# EAGLE board Control board POD (CMS) (EAGLE 6.1)
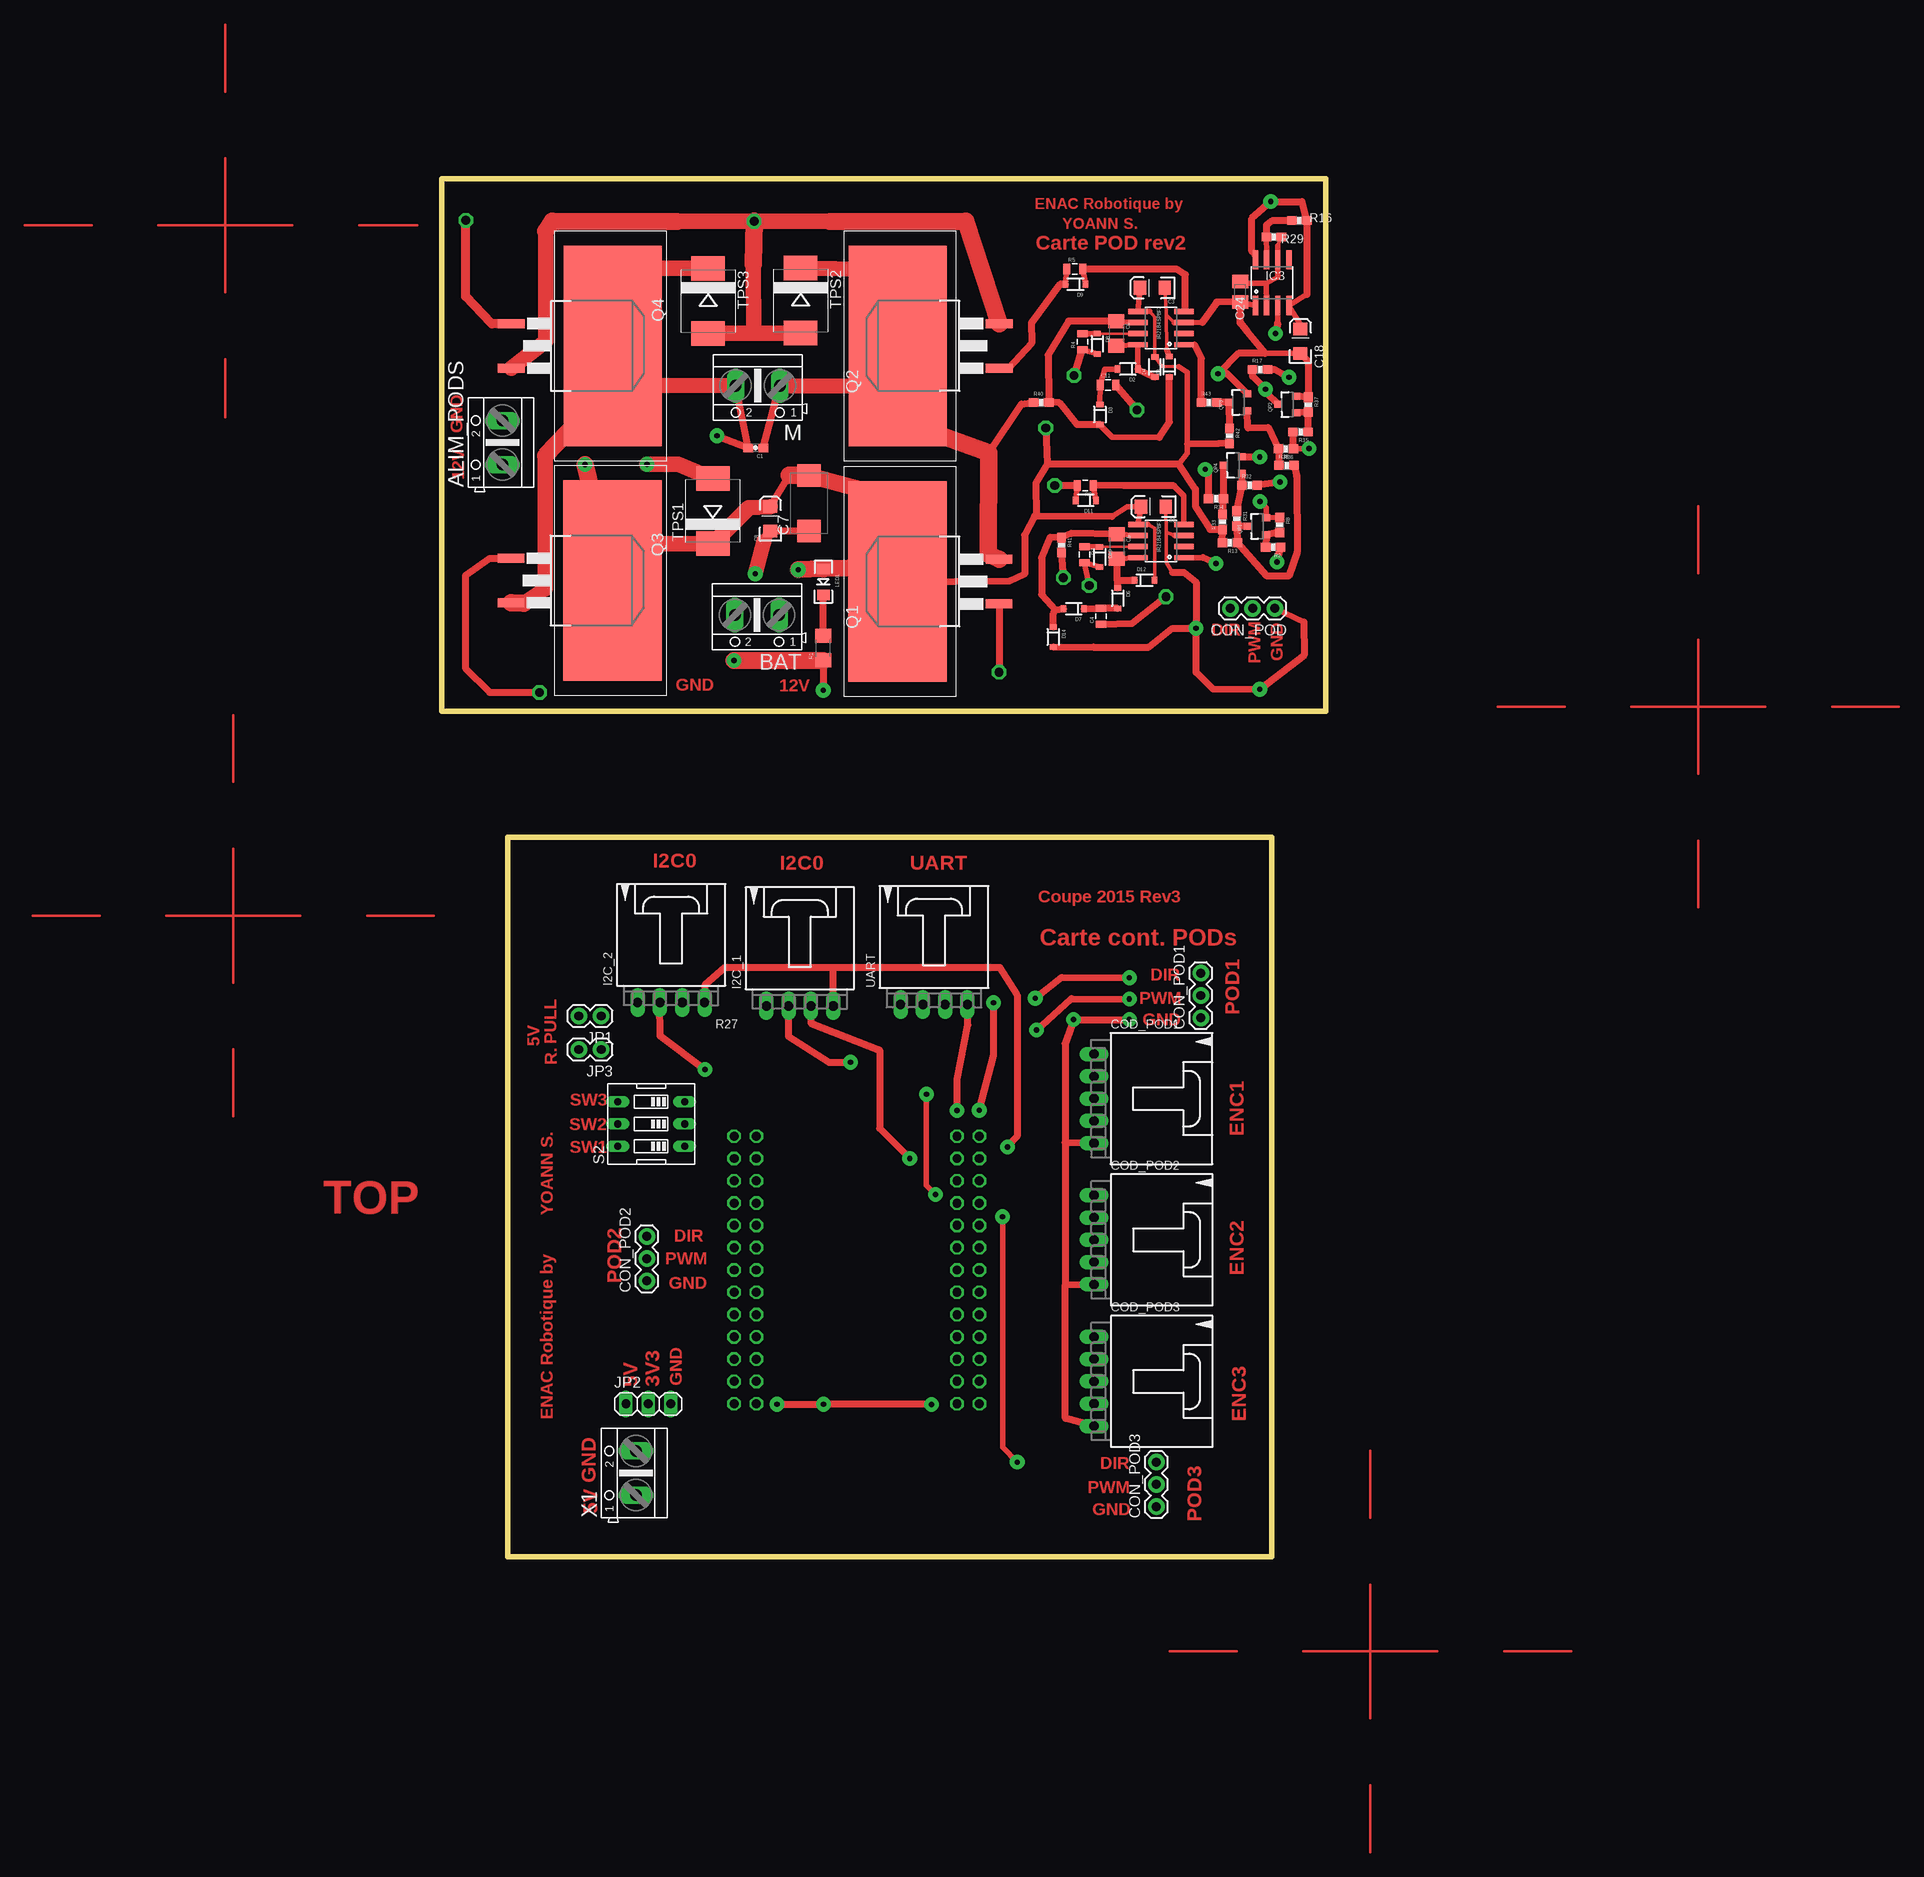
[diagram p0: board, top side]
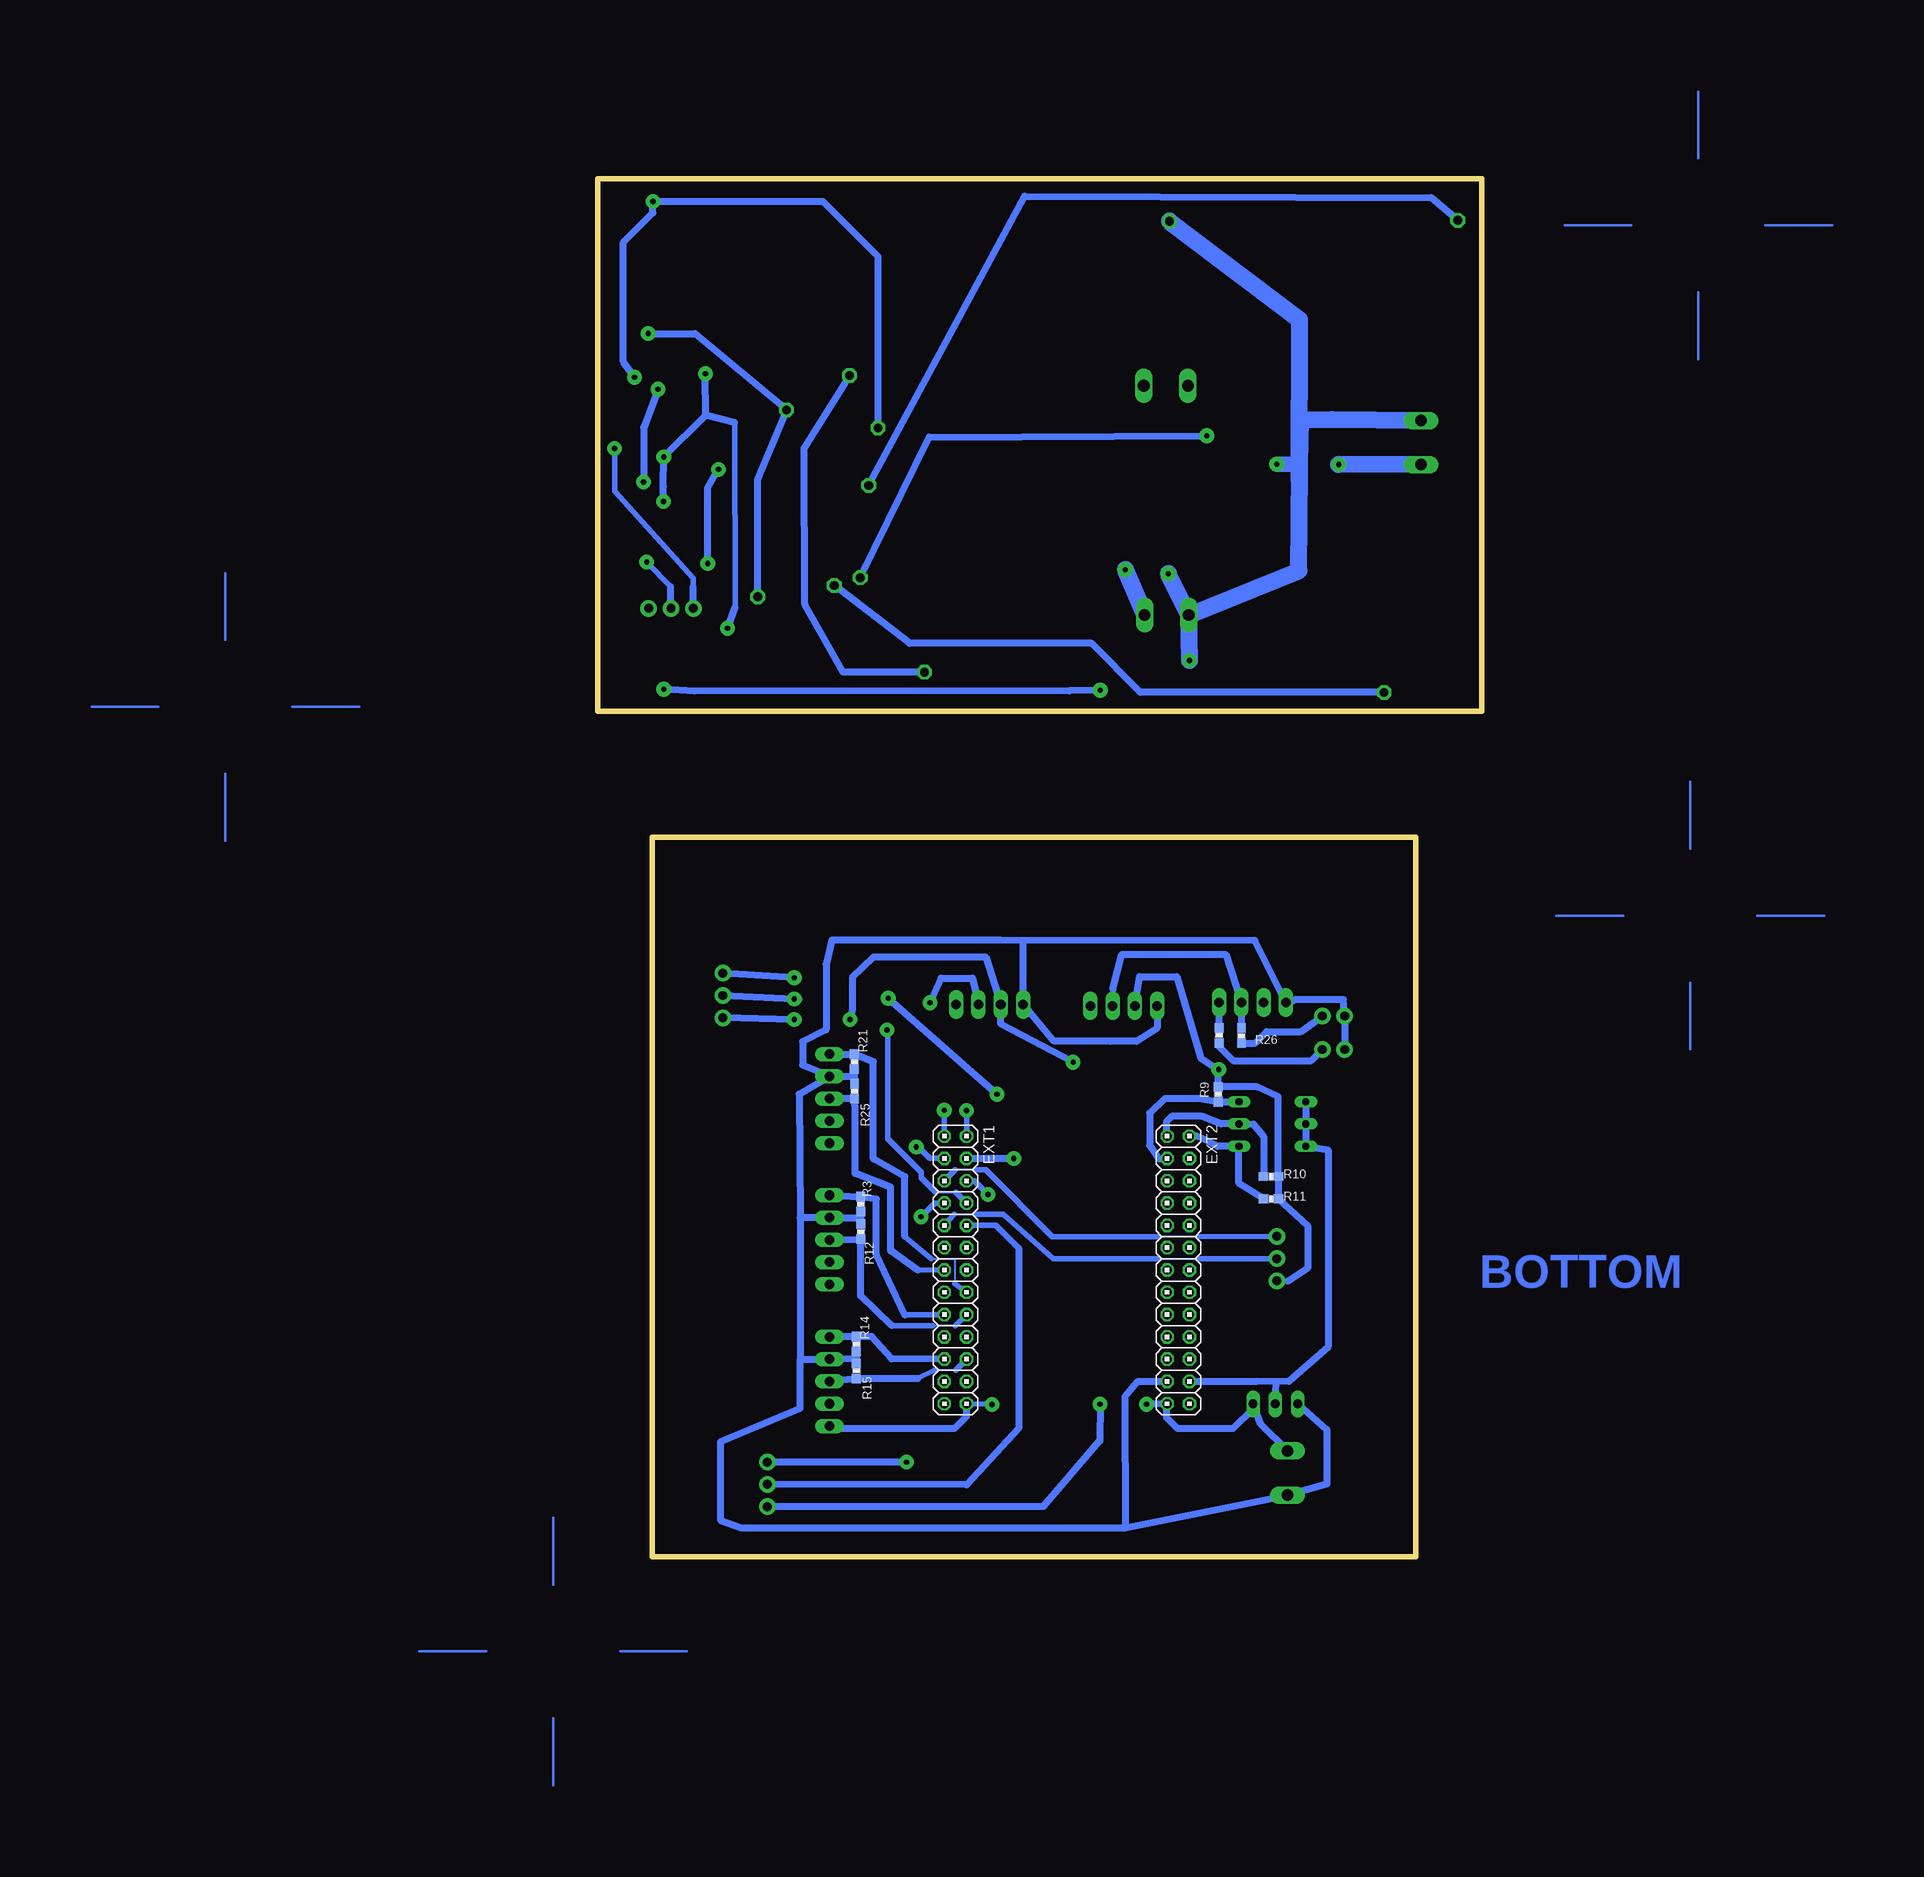
[diagram p1: board, bottom side, seen from below]

Size 100.72 x 157 mm. Coordinates in mm from the lower left corner, seen from the top.
Outline: 7.54,0 94.54,0 94.54,82 7.54,82 7.54,0
Outline: 100.72,157 0,157 0,96.36 100.72,96.36 100.72,157
Copper layers (1*16): Top 0.035mm / dielectric 1.5mm / Bottom 0.035mm
Design rules: minimum track width 10mil, minimum drill 24mil, track to track 10mil, track to pad 10mil, pad to pad 10mil, via to via 10mil, smd to smd 8mil, copper to edge 30mil, drill to drill 8mil, minimum pad ring 10mil, minimum via ring 8mil, stop-mask expansion 4mil, vias tented up to drill 0mil, thermal gap 10mil
Net classes: 0 default: width 1 mm; 1 LPC: width 0.5 mm; 2 POWER: width 4 mm

## Footprints (pad centres in the part's own frame; a part is rotated, then mirrored left to right if it is on the bottom)
AK500/2 = drill 1.321 long: 1 -2.515,0; 2 2.515,0
0603-CAP = smd 1.1 x 1: 1 -0.85,0; 2 0.85,0
EIA3216 = smd 1.4 x 1.6: A 1.4,0; C -1.4,0
0805 = smd 0.8 x 1.2: 1 -0.9,0; 2 0.9,0
1206 = smd 1.6 x 1.8: 1 -1.4,0; 2 1.4,0
D/7343-31R = smd 2.55 x 2.7: + 3.175,0; - -3.175,0
R/2012-12R = smd 1.55 x 1.8: + 1.175,0; - -1.175,0
70553-05 = drill 1.092 long: 1 -5.08,-7.62; 2 -2.54,-7.62; 3 0,-7.62; 4 2.54,-7.62; 5 5.08,-7.62
1X03 = drill 1.016 pad 1.88: 1 0,0; 2 2.54,0; 3 5.08,0
SOD-323 = smd 0.63 x 0.83: A 1.15,0; C -1.15,0
2X13 = drill 1.016 octagon: 1 -15.24,-1.27; 2 -15.24,1.27; 3 -12.7,-1.27; 4 -12.7,1.27; 5 -10.16,-1.27; 6 -10.16,1.27; 7 -7.62,-1.27; 8 -7.62,1.27; 9 -5.08,-1.27; 10 -5.08,1.27; 11 -2.54,-1.27; 12 -2.54,1.27; 13 0,-1.27; 14 0,1.27; 15 2.54,-1.27; 16 2.54,1.27; 17 5.08,-1.27; 18 5.08,1.27; 19 7.62,-1.27; 20 7.62,1.27; 21 10.16,-1.27; 22 10.16,1.27; 23 12.7,-1.27; 24 12.7,1.27; 25 15.24,-1.27; 26 15.24,1.27
70553-04 = drill 1.092 long: 1 -3.81,-7.62; 2 -1.27,-7.62; 3 1.27,-7.62; 4 3.81,-7.62
SO08 = smd 0.61 x 2.21: 1 -1.905,-2.616; 2 -0.635,-2.616; 3 0.635,-2.616; 4 1.905,-2.616; 5 1.905,2.616; 6 0.635,2.616; 7 -0.635,2.616; 8 -1.905,2.616
1X02 = drill 1.016 pad 1.88: 1 0,0; 2 2.54,0
1X03' = drill 1.016 long: 1 -2.54,0; 2 0,0; 3 2.54,0
LED-1206 = smd 1.2 x 1.4: A -1.5,0; C 1.5,0
D2PAK-3 = smd 1.016 x 3.05: 1 -2.54,-11.31; 3 2.54,-11.31 | smd 22.86 x 11.176: 4 0,0.254
SOT23-3 = smd 0.8 x 0.9: 1 -0.95,-1; 2 0.95,-1; 3 0,1.1
0603-RES = smd 1.1 x 1: 1 -0.85,0; 2 0.85,0
EDG-03 = drill 0.813 long: 1 -2.54,-3.81; 2 0,-3.81; 3 2.54,-3.81; 4 2.54,3.81; 5 0,3.81; 6 -2.54,3.81
SMC = smd 2.8 x 3.8: A 3.7,0; C -3.7,0

## Placement (x,y rotation side)
ALIM_PODS  12  [AK500/2]  6.94,126.94 90 top
BAT  12  [AK500/2]  35.91,107.29 180 top
C1  1uF  [0603-CAP]  35.78,126.34 180 top
C2  10uF  [EIA3216]  81.08,119.65 180 top
C3  10uF  [EIA3216]  80.97,144.56 180 top
C4  680nF  [0805]  75.12,107.15 90 top
C5  680nF  [1206]  76.92,115.11 270 top
C6  680nF  [1206]  76.84,139.37 270 top
C7  220uF  [D/7343-31R]  41.84,120.03 90 top
C8  220nF  [EIA3216]  37.45,118.25 90 top
C11  680nF  [0805]  75.91,133.52 0 top
C18  10uF  [EIA3216]  97.83,138.5 90 top
C24  100nF  [R/2012-12R]  90.96,144.14 90 top
COD_POD1  C-GRID-05-70553  [70553-05]  81.93,52.2 270 top
COD_POD2  C-GRID-05-70553  [70553-05]  81.94,36.11 270 top
COD_POD3  C-GRID-05-70553  [70553-05]  81.94,19.98 270 top
CON_POD  [1X03]  94.92,108.06 180 top
CON_POD1  [1X03]  86.48,61.41 90 top
CON_POD2  [1X03]  23.36,31.43 90 top
CON_POD3  [1X03]  81.42,5.71 90 top
D1  [SOD-323]  82.9,135.58 90 top
D2  [SOD-323]  78.16,135.32 180 top
D3  [SOD-323]  74.99,130.13 270 top
D4  [SOD-323]  81.25,135.56 90 top
D6  [SOD-323]  77.01,109.21 270 top
D7  [SOD-323]  72.01,108 180 top
D8  [SOD-323]  74.68,138.21 270 top
D9  [SOD-323]  72.22,144.97 180 top
D10  [SOD-323]  74.95,113.92 270 top
D11  [SOD-323]  73.38,120.36 180 top
D12  [SOD-323]  80.07,111.26 0 top
D14  [SOD-323]  69.67,104.8 270 top
EXT1  [2X13]  59.98,32.68 270 bottom
EXT2  [2X13]  34.58,32.68 270 bottom
I2C_1  C-GRID-04-70553  [70553-04]  40.8,70.39 0 top
I2C_2  C-GRID-04-70553  [70553-04]  26.13,70.78 0 top
IC3  NE555D  [SO08]  94.61,145.15 0 top
IR2184SPBF1  IR2184SPBF  [SO08]  81.94,115.72 90 top
IR2184SPBF2  IR2184SPBF  [SO08]  81.93,139.99 90 top
JP1  [1X02]  18.17,61.61 180 top
JP2  [1X03']  23.53,17.42 0 top
JP3  [1X02]  18.17,57.8 180 top
LED1  [LED-1206]  43.48,111.06 270 top
M  [AK500/2]  36,133.42 180 top
Q1  MOSFET-NCHANNELD2PAK  [D2PAK-3]  52.18,111.11 90 top
Q2  MOSFET-NCHANNELD2PAK  [D2PAK-3]  52.19,137.96 90 top
Q3  MOSFET-NCHANNELD2PAK  [D2PAK-3]  19.2,111.23 270 top
Q4  MOSFET-NCHANNELD2PAK  [D2PAK-3]  19.24,137.96 270 top
QP1  [SOT23-3]  92.92,117.41 90 top
QP2  [SOT23-3]  96.38,131.28 90 top
QP3  [SOT23-3]  90.79,131.54 90 top
QP4  [SOT23-3]  90.18,124.37 90 top
R1  560  [1206]  43.45,103.53 90 top
R2  10k  [0603-RES]  94.72,115.03 180 top
R3  3k3  [0603-RES]  70.77,40.17 270 bottom
R4  15  [0805]  72.99,138.44 90 top
R5  15  [0805]  72.12,146.71 0 top
R6  15  [0805]  73.32,122.06 180 top
R7  15  [0805]  73.21,114.18 270 top
R8  10k  [0603-RES]  95.46,117.57 270 top
R9  10k  [0603-RES]  30.04,52.69 90 bottom
R10  10k  [0603-RES]  24.02,43.32 0 bottom
R11  10k  [0603-RES]  24.02,40.78 0 bottom
R12  3k3  [0603-RES]  70.77,37.05 270 bottom
R13  1k  [0603-RES]  89.8,115.53 180 top
R14  3k3  [0603-RES]  71.27,24.22 270 bottom
R15  3k3  [0603-RES]  71.27,21.17 270 bottom
R16  1k  [0603-RES]  97.71,152.25 0 top
R17  1k  [0603-RES]  93.23,135.27 0 top
R21  3k3  [0603-RES]  71.49,56.41 270 bottom
R25  3k3  [0603-RES]  71.49,53.05 270 bottom
R26  3.3k  [0603-RES]  27.37,59.38 90 bottom
R27  3.3k  [0603-RES]  29.92,59.4 90 bottom
R29  10k  [0603-RES]  94.8,150.37 180 top
R31  10k  [0603-RES]  90.58,118.28 270 top
R32  10k  [0603-RES]  92.03,122.09 0 top
R33  1k  [0603-RES]  88.96,117.9 90 top
R34  10k  [0603-RES]  88.22,120.54 180 top
R35  10k  [0603-RES]  97.85,128.16 180 top
R36  10k  [0603-RES]  96.17,126.23 180 top
R37  10k  [0603-RES]  98.71,131.26 270 top
R38  10k  [0603-RES]  96.25,124.35 0 top
R40  15  [0603-RES]  68.3,131.51 0 top
R41  15  [0603-RES]  70.6,115.26 270 top
R42  1k  [0603-RES]  89.75,127.7 270 top
R43  10k  [0603-RES]  87.41,131.51 0 top
S2  [EDG-03]  23.86,49.31 90 top
TPS1  [SMC]  30.89,119.13 90 top
TPS2  [SMC]  40.89,143.12 270 top
TPS3  [SMC]  30.35,143.09 270 top
UART  C-GRID-04-70553  [70553-04]  56.08,70.55 0 top
X1  [AK500/2]  22.13,9.54 90 top

## Library data of the parts
ALIM_PODS BAT M X1 = con-ptr500; OC_FARNELL: unknown; OC_NEWARK: unknown
C1 IC3 JP1 JP3 Q1-Q4 QP1-QP4 R1 = SparkFun
C2 C3 C18 = SparkFun-Capacitors; PROD_ID: CAP-00811
C4-C6 C11 = SparkFun-Capacitors
C7 C24 = rcl
C8 = SparkFun-Capacitors; PROD_ID: CAP-00811; VALUE: 10uF
COD_POD1-COD_POD3 I2C_1 I2C_2 UART = con-molex; OC_FARNELL: unknown; OC_NEWARK: unknown
CON_POD CON_POD1-CON_POD3 = SparkFun-Connectors
D1-D4 D6-D12 D14 = SparkFun-DiscreteSemi; PROD_ID: DIO-09646
EXT1 EXT2 JP2 = pinhead
IR2184SPBF1 IR2184SPBF2 = IR2184SPBF
LED1 = SparkFun-LED; PROD_ID: DIO-09955; VALUE: WHITE
R2-R17 R21 R25-R27 R29 R31-R38 R40-R43 = SparkFun-Passives
S2 = special
TPS1-TPS3 = diode

## Nets
3V3 [POWER]: EXT2.24 JP2.2 S2.4 S2.5 S2.6
5V_CMD: COD_POD1.2 COD_POD2.2 COD_POD3.2 EXT2.23 I2C_1.1 I2C_2.1 JP1.2 JP2.1 JP3.2 R3.2 R12.1 R14.2 R15.1 R21.2 R25.1 UART.1 X1.1
12V_BAT: ALIM_PODS.1 BAT.1 C2.A C3.A C7.+ C8.A C18.A D4.A D12.A IC3.4 IC3.8 IR2184SPBF1.5 IR2184SPBF2.5 LED1.A Q1.4 Q3.4 R13.2 R16.2 R17.2 R33.1 R42.2 TPS1.C
BSTRP: C4.1 C11.2 IC3.3
CHA_POD1_LPC: COD_POD1.3 EXT1.13 R25.2
CHA_POD2_LPC: COD_POD2.3 EXT1.18 R12.2
CHA_POD3_LPC: COD_POD3.3 EXT1.22 R15.2
CHB_POD1_LPC: COD_POD1.1 EXT1.16 R21.1
CHB_POD2_LPC: COD_POD2.1 EXT1.17 R3.1
CHB_POD3_LPC: COD_POD3.1 EXT1.21 R14.1
DIR: CON_POD.3 R35.2 R36.1
DIR_POD1_LPC: CON_POD1.3 EXT1.6
DIR_POD2_LPC: CON_POD2.3 EXT1.5
DIR_POD3_LPC: CON_POD3.3 EXT1.7
GATE_Q3: D9.A Q2.1 R5.1
GATE_Q4: D10.A Q3.1 R7.2
GND_CMD [POWER]: COD_POD1.5 COD_POD2.5 COD_POD3.5 CON_POD1.1 CON_POD2.1 CON_POD3.1 EXT1.26 EXT2.25 I2C_1.2 I2C_2.2 JP2.3 R9.2 R10.2 R11.2 UART.2 X1.2
GND_PWR: ALIM_PODS.2 BAT.2 C2.C C3.C C7.- C8.C C18.C C24.- CON_POD.1 D1.A D14.A IC3.1 IR2184SPBF1.3 IR2184SPBF2.3 Q2.3 Q4.3 QP1.2 QP2.2 QP3.2 QP4.2 R1.1 R8.1 R37.1 TPS1.A TPS2.A TPS3.A
HO_A: D8.C IR2184SPBF2.7 R4.2
HO_B: D10.C IR2184SPBF1.7 R7.1
IN1: IR2184SPBF1.1 R34.2
IN2: IR2184SPBF2.1 R43.1
LO_A: D9.C IR2184SPBF2.4 R5.2
LO_B: D11.C IR2184SPBF1.4 R6.1
N$1: C11.1 D2.A D3.C
N$2: D8.A Q1.1 R4.1
N$3: C1.2 M.2 Q3.3 Q4.4 R41.2 TPS3.C
N$4: C6.2 D2.C D4.C IR2184SPBF2.8
N$5: C4.2 D6.A D7.C
N$7: C5.2 D6.C D12.C IR2184SPBF1.8
N$10: LED1.C R1.2
N$11: C1.1 M.1 Q1.3 Q2.4 R40.1 TPS2.C
N$12: D11.A Q4.1 R6.2
N$33: IC3.7 R16.1 R29.2
N$37: C24.+ IC3.2 IC3.6 R29.1
N$52: JP1.1 R26.1
N$53: QP1.1 R2.2 R8.2
N$54: JP3.1 R27.1
N$56: QP2.1 R35.1 R37.2
N$58: QP3.1 R36.2 R38.1
N$61: QP1.3 R13.1 R31.2 R38.2
N$63: QP4.1 R31.1 R32.1
N$64: QP2.3 R17.1 R32.2
N$65: QP4.3 R33.2 R34.1
N$69: QP3.3 R42.1 R43.2
P0.13: EXT1.14
P0.22: EXT1.23
P0.23: EXT1.24
P0.25: EXT1.25
P0.31: EXT2.4
P1.16: EXT2.5
P1.17: EXT2.6
P1.18: EXT2.7
P1.19: EXT2.8
P1.20: EXT2.9
P1.21: EXT2.10
P1.22: EXT2.11
P1.23: EXT2.12
P1.24: EXT2.13
P1.25: EXT2.14
P1.26: EXT2.15
P1.27: EXT2.16
P1.28: EXT2.17
P1.29: EXT2.18
P1.30: EXT2.19
P1.31: EXT2.20
PWM: CON_POD.2 R2.1
PWM_POD1_LPC: CON_POD1.2 EXT1.8
PWM_POD2_LPC: CON_POD2.2 EXT1.9
PWM_POD3_LPC: CON_POD3.2 EXT1.10
RX0_LPC: EXT1.2 UART.4
SCL0_LPC: EXT1.3 I2C_1.4 I2C_2.4 R27.2
SD2_POD1_LPC: EXT1.11
SDA0_LPC: EXT1.4 I2C_1.3 I2C_2.3 R26.2
SW1_LPC: EXT2.1 R10.1 S2.2
SW2_LPC: EXT2.2 R11.1 S2.1
SW3_LPC: EXT2.3 R9.1 S2.3
TX0_LPC: EXT1.1 UART.3
VBAT_LPC: EXT2.22
VREF: EXT2.21
VS_A: C6.1 D1.C D3.A IR2184SPBF2.6 R40.2
VS_B: C5.1 D7.A D14.C IR2184SPBF1.6 R41.1

## Tracks (layer width: path | path; a pad name or v marks a point on that pad's centre or on a via)
3V3
  Bottom 0.813: S2.4 S2.5 S2.6 17.51,46.35 17.51,23.92 21.98,19.98 23.45,19.95 | EXT2.24 25.69,19.98 23.45,19.95 | JP2.2 23.45,19.95
5V_CMD
  Bottom 0.406: 21.98,62.88 22.32,62.88 I2C_2.1
  Bottom 0.813: EXT2.23 39.2,19.98 40.67,18.25 40.62,3.29 | R3.2 70.77,38.62 | 70.77,38.62 R12.1 | 70.77,38.62 COD_POD2.2 77.66,38.63 | R21.2 71.5,54.75 | 71.5,54.75 R25.1 | COD_POD1.2 71.5,54.75 | R14.2 71.27,22.62 | 71.27,22.62 R15.1 | 71.27,22.62 COD_POD3.2 77.65,22.49 | 77.65,22.49 77.65,36.72 77.66,38.63 | 77.66,38.63 77.78,52.72 COD_POD1.2 | COD_POD1.2 77.4,56.02 77.4,58.69 74.71,60.03 74.71,67.53 74.05,70.25 54.85,70.25 52.26,70.19 | JP2.1 17.66,14.49 17.66,8.27 X1.1 40.62,3.29 | 40.62,3.29 84.39,3.29 86.75,4.18 86.75,13.1 77.68,16.91 77.65,22.49 | 21.98,62.88 21.37,63.49 15.77,63.49 JP1.2 JP3.2 | I2C_2.1 25.87,70.22 52.26,70.19 | I2C_1.1 36.99,60.24 39.33,58.71 42.32,58.71 48.75,58.74 UART.1 52.26,70.19
12V_BAT  (via drill 0.6 pad 1.68, 1 pad 1.68)
  Top 0.406: 80.66,141.89 81.25,141.24 D4.A 82.05,135.61 83.96,135.59 | 80.45,117.63 81.22,117.18 D12.A | 98.51,152.34 R16.2 | 92.29,148.72 IC3.8 | 52.16,111.03 Q1.4
  Top 0.61: C3.A 79.3,141.84 IR2184SPBF2.5 80.66,141.89 | 76.36,118.52 78.12,119.65 C2.A IR2184SPBF1.5 80.45,117.63 | 83.96,135.59 84.95,134.98 84.95,126.76 84.95,125.74 83.98,124.47 | 97.79,140.4 IC3.4 98.56,143.81
  Top 0.813: C8.A 39.61,123.22 | 67.72,118.53 67.7,122.31 68.97,124.47 | 76.36,118.52 67.72,118.53 | R42.2 88.48,126.81 84.95,126.76 | R13.2 R33.1 87.54,117.06 85.86,119.67 85.86,121.63 83.98,124.47 68.97,124.47 | R16.2 98.56,143.81 | 97.79,140.4 C18.A | 98.51,152.34 98,154.4 v94.45,154.4 92.29,152.49 92.29,148.72 | 52.16,111.03 64.7,111.17 66.4,111.95 66.4,116.42 67.55,118.58 67.72,118.56 67.72,118.53 | R17.2 94.88,135.27 v96.53,134.38 | v68.81,128.62 68.97,124.47
  Top 1.778: C8.A 34.99,119.53 TPS1.C 23.66,115.43 Q3.4
  Top 1.93: 21.22,121.05 Q3.4 v16.32,124.45 | C7.+ 50.38,120.92 51.68,112.72 | 51.68,112.72 Q1.4 | 51.68,112.72 LED1.A v40.62,112.46
  Top 2: 39.61,123.22 C7.+
  Bottom 0.813: v96.53,134.38 97.8,136.16 97.8,149.75 94.45,153.1 v94.45,154.4 75.04,154.4 68.81,148.16 v68.81,128.62
  Bottom 1.93: v40.62,112.46 BAT.1 | ALIM_PODS.1 v16.32,124.45
BSTRP  (via drill 0.6 pad 1.68, 1 pad 1.68)
  Top 0.61: IC3.3 95.23,140.55
  Top 0.813: C11.2 v79.21,130.66 | C4.1 78.65,106.35 v82.5,109.37 | 95.23,140.55 v94.98,139.36
  Bottom 0.813: v82.5,109.37 82.49,122.8 v79.21,130.66 89.65,139.36 v94.98,139.36
CHA_POD1_LPC
  Bottom 0.61: 64.25,32.67 EXT1.13
  Bottom 0.813: COD_POD1.3 R25.2 71.4,51.17 71.4,43.68 67.37,42.13 67.37,34.86 64.25,32.67
CHA_POD2_LPC
  Bottom 0.254: 59.98,26.33 62.54,26.33
  Bottom 0.61: EXT1.18 59.98,26.33 | 62.54,26.33 67.22,26.33
  Bottom 0.813: COD_POD2.3 R12.2 70.77,29.73 67.22,26.33
CHA_POD3_LPC
  Bottom 0.254: 59.93,21.25 62.39,21.25
  Bottom 0.61: EXT1.22 59.93,21.25 | 64.25,20.34 62.39,21.25
  Bottom 0.813: COD_POD3.3 R15.2 64.25,20.34
CHB_POD1_LPC
  Bottom 0.254: 62.75,33.95 60.08,33.95 60.08,31.13
  Bottom 0.61: 62.75,33.95 65.74,36.46 | 60.08,31.13 EXT1.16
  Bottom 0.813: COD_POD1.1 R21.1 69.33,56.43 69.33,45.33 65.74,43.32 65.74,36.46
CHB_POD2_LPC
  Bottom 0.61: EXT1.17 65.74,27.57
  Bottom 0.813: COD_POD2.1 R3.1 68.99,40.76 68.99,34.46 65.74,27.57
CHB_POD3_LPC
  Bottom 0.813: R14.1 71.76,25.07 | 71.76,25.07 COD_POD3.1 | EXT1.21 67.24,22.55 69.5,25.09 71.76,25.07
DIR  (via drill 0.6 pad 1.68)
  Top 0.61: v98.81,126.25 R36.1
  Top 0.813: R35.2 R36.1 97.16,126.18
  Bottom 0.61: 89.87,110.48 89.85,111.47 98.81,121.38 v98.81,126.25
  Bottom 0.813: CON_POD.3 89.87,110.48
DIR_POD1_LPC  (via drill 0.6 pad 1.68)
  Top 0.61: v55.23,52.7 55.23,42.33 v56.27,41.29
  Top 0.813: v67.62,63.64 70.65,66 v78.34,65.98
  Bottom 0.61: v56.27,41.29 57.82,42.84 EXT1.6
  Bottom 0.813: v55.23,52.7 v67.62,63.64 | CON_POD1.3 v78.34,65.98 78.27,66.06
DIR_POD2_LPC
  Bottom 0.254: 57.51,44.11 60,44.11 | 32.32,36.49 36.79,36.49
  Bottom 0.61: 60,44.11 EXT1.5 | CON_POD2.3 32.32,36.49 | 36.79,36.49 48.93,36.49 56.55,44.11 57.51,44.11
DIR_POD3_LPC  (via drill 0.6 pad 1.68)
  Top 0.61: v65.57,10.79 63.89,12.46 v63.89,38.75
  Bottom 0.61: v63.89,38.75 62.34,40.3 EXT1.7
  Bottom 0.813: v65.57,10.79 CON_POD3.3
GATE_Q3
  Top 0.61: R5.1 D9.A
  Top 0.813: D9.A 70.42,144.97 67.22,140.63 67.27,138.32 64.62,135.42 Q2.1
GATE_Q4  (via drill 1 pad 1.68)
  Top 0.61: D10.A R7.2 v73.77,110.66
  Top 0.813: v11.14,98.47 5.45,98.5 2.75,101.16 2.73,111.8 5.47,113.76 Q3.1
  Bottom 0.813: v11.14,98.47 38.91,98.47 44.43,104.06 65.19,104.06 v73.77,110.66
GND_CMD  (via drill 0.6 pad 1.68)
  Top 0.813: v29.98,55.51 24.88,59.32 I2C_2.2 | COD_POD3.5 71.05,15.76 71.05,31 | 71.05,31 COD_POD2.5 | COD_POD1.5 71.02,47.17 | 71.02,47.17 71.05,46.5 71.05,31 | 71.02,47.17 71.02,58.49 v71.99,61.2 v78.34,61.2 | I2C_1.2 39.53,59.27 44.1,56.33 45.27,56.33 v46.57,56.35 | v38.21,17.39 v43.49,17.39 v55.81,17.36
  Bottom 0.406: EXT2.25 35.95,17.44
  Bottom 0.61: EXT1.26 v55.81,17.36 | CON_POD2.1 22.13,31.41
  Bottom 0.813: 21.78,12.41 X1.2 25.18,15.1 JP2.3 26.07,16.88 28.33,14.62 34.68,14.62 35.95,15.89 35.95,17.44 | I2C_1.2 39,66.11 34.77,66.1 32.01,56.78 30.03,55.51 | 30.03,55.51 v29.98,55.51 | v46.57,56.35 54.8,60.7 UART.2 56.52,68.34 69.3,68.34 71.71,66 71.71,62.32 v71.99,61.2 | 22.13,31.41 19.8,32.93 19.8,37.66 R11.2 R10.2 23.2,52.41 25.64,53.53 R9.2 30.03,55.51 | EXT2.25 v38.21,17.39 | v43.49,17.39 43.52,13.2 49.97,5.71 CON_POD3.1 | v78.34,61.2 CON_POD1.1 | COD_POD3.5 74.04,14.62 60.08,14.62 58.71,15.99 EXT1.26
GND_PWR  (via drill 0.6 pad 1.68, 1 pad 1.68)
  Top 0.406: C3.C 82.57,141.71 82.57,141.5 | 82.57,141.5 83.47,140.6 | C2.C 82.53,116.7 | 82.53,116.7 83.46,116.38 | 82.58,137.6 82.57,141.5 | 82.53,116.7 82.53,113.33 83.24,112.16
  Top 0.61: 83.47,140.6 IR2184SPBF2.3 86.65,140.63 | 83.46,116.38 IR2184SPBF1.3 | D1.A 82.58,137.6 | R8.1 QP1.2 93.92,119.53 v93.23,120.23 | 93.81,137.1 C18.C | CON_POD.1 98.26,106.49 | C24.- IC3.1
  Top 0.813: C7.- C8.C | 98.26,106.49 98.31,102.78 v93.2,98.85 87.84,98.87 85.94,100.78 v85.94,105.78 | QP2.2 R37.1 98.71,136.22 C18.C | QP4.2 92.16,125.31 v93.2,125.31 | 86.65,140.63 88.27,142.94 C24.- 90.97,140.58 91.78,139.58 93.81,137.1 90.76,137.1 v88.45,134.79 89.49,134.79 QP3.2 | 83.24,112.16 84.57,112.16 85.94,111.04 v85.94,105.78 | v85.94,105.78 83.24,105.78 80.58,103.65 74.25,103.65 D14.A | R1.1 v43.47,98.72
  Top 1.27: 36.69,115.64 C8.C
  Top 1.778: Q4.3 11.86,138.51 11.86,151.03 | 44.23,152.14 v35.59,152.17 26.83,152.14 | TPS3.A 35.57,139.4 | 35.57,139.4 TPS2.A | 35.48,147.26 35.57,139.4 | v35.72,112 36.69,115.64 | TPS1.A 26.96,124.47 v23.38,124.47
  Top 1.93: 12.58,152.13 26.83,152.14 | 44.23,152.14 59.71,152.16 | v33.31,102.12 R1.1
  Top 2: 59.71,152.16 Q2.3 | 11.86,151.03 12.58,152.13 | v35.59,152.17 35.48,147.26
  Bottom 0.61: 85.07,108.17 85.12,129.22
  Bottom 0.813: v93.2,98.85 89.72,98.63 46.99,98.65 v43.47,98.72 | v93.23,120.23 93.25,121.96 v93.2,125.31 88.43,130.04 | 88.43,130.04 v88.45,134.79 | v85.94,105.78 85.07,108.17 | 85.12,129.22 88.43,130.04
  Bottom 1.778: v23.38,124.47 v23.37,124.47 20.8,124.47
  Bottom 1.93: v35.59,152.17 20.77,140.96 20.83,122.67 20.8,124.47 20.72,129.48 | BAT.2 20.86,112.36 20.72,129.48 | BAT.2 v35.72,112 | v33.31,102.12 BAT.2 | ALIM_PODS.2 17.1,129.56 20.72,129.48
HO_A
  Top 0.305: IR2184SPBF2.7 D8.C
  Top 0.61: D8.C R4.2
HO_B
  Top 0.305: IR2184SPBF1.7 D10.C
  Top 0.61: R7.1 D10.C
IN1  (via drill 0.6 pad 1.68)
  Top 0.61: IR2184SPBF1.1 86.75,113.83
  Top 0.813: v88.2,113.17 86.75,113.83 | R34.2 87.37,123.5 v86.98,123.89
  Bottom 0.813: v88.2,113.17 88.2,121.78 v86.98,123.89
IN2
  Top 0.406: IR2184SPBF2.1 85.76,138.06
  Top 0.813: R43.1 86.55,136.54 85.76,138.06
LO_A
  Top 0.61: IR2184SPBF2.4 84.8,141.93 84.69,142.03 | R5.2 D9.C
  Top 0.813: 84.69,142.03 84.72,146.07 83.72,146.71 R5.2
LO_B
  Top 0.61: IR2184SPBF1.4 84.56,120.88 83.41,122.02 | D11.C R6.1
  Top 0.813: R6.1 77.66,122.03 83.41,122.02
N$1
  Top 0.61: D3.C C11.1 75.52,135.31 D2.A
N$2  (via drill 1 pad 1.68)
  Top 0.61: R4.1 D8.A
  Top 0.813: Q1.1 v63.5,100.79 | v72.04,134.58 R4.1
  Bottom 0.813: v63.5,100.79 72.78,100.78 77.13,108.5 77.23,126.32 v72.04,134.58
N$3  (via drill 0.6 pad 1.68, 1 pad 1.68)
  Top 0.813: M.2 C1.2 v31.35,127.71 | R41.2 v70.82,111.56
  Top 1.778: 11.81,125.43 11.8,110.28 9.33,108.65 | TPS3.C 21.6,146.83 Q4.4 | M.2 22.11,133.49 18.84,135.69
  Top 1.93: 14.4,128.16 11.81,125.43
  Top 2: Q4.4 18.84,135.69 17.41,130.75 14.4,128.16 | Q3.3 9.33,108.65
  Bottom 0.813: v70.82,111.56 62.97,127.57 v31.35,127.71
N$4
  Top 0.61: D2.C IR2184SPBF2.8 C6.2
  Top 0.813: D2.C D4.C
N$5
  Top 0.813: D6.A C4.2 D7.C
N$6
  Bottom 0.305: -9.42,151.7 -17.04,151.7
N$7
  Top 0.61: C5.2 IR2184SPBF1.8 80.16,113.86
  Top 0.813: D6.C 77,111.27 76.92,111.27 | 76.92,111.27 D12.C | C5.2 76.92,111.27
N$8
  Bottom 0.305: -32.28,151.7 -39.9,151.7
N$9
  Bottom 0.305: -24.66,144.08 -24.66,136.46
N$10
  Top 0.813: R1.2 LED1.C
N$11
  Top 0.813: C1.1 M.1 | 62.29,125.81 66.05,131.33 R40.1
  Top 1.778: TPS2.C 49.16,146.7 Q2.4 | M.1 49.54,133.37 53.15,134.58
  Top 1.93: 55.38,128.31 53.15,134.58 Q2.4
  Top 2: 55.38,128.31 62.29,125.81 62.24,114.24 Q1.3
N$12  (via drill 1 pad 1.68)
  Top 0.61: R6.2 D11.A
  Top 0.813: v69.84,122.06 R6.2
  Top 1.016: Q4.1 5.72,140.48 2.73,143.6 v2.75,152.26
  Bottom 0.813: v69.84,122.06 52.1,155.01 5.77,154.85 v2.75,152.26
N$13
  Bottom 0.305: -24.66,159.32 -24.66,166.94
N$14
  Bottom 0.305: 127.92,96.84 135.54,96.84
N$15
  Bottom 0.305: 143.16,104.46 143.16,112.08
N$16
  Bottom 0.305: 150.78,96.84 158.4,96.84
N$17
  Bottom 0.305: 143.16,89.22 143.16,81.6
N$18
  Top 0.305: -32.28,151.7 -17.04,151.7
N$19
  Top 0.305: -24.66,144.08 -24.66,159.32
N$20
  Top 0.305: -9.42,151.7 -2.8,151.7
N$21
  Top 0.305: -24.66,129.84 -24.66,136.46
N$22
  Top 0.305: -47.52,151.7 -39.9,151.7
N$23
  Top 0.305: -24.66,174.56 -24.66,166.94
N$24
  Top 0.305: 120.3,96.84 127.92,96.84
N$25
  Top 0.305: 135.54,96.84 150.78,96.84
N$26
  Top 0.305: 158.4,96.84 166.02,96.84
N$27
  Top 0.305: 143.16,104.46 143.16,89.22
N$28
  Top 0.305: 143.16,112.08 143.16,119.7
N$29
  Top 0.305: 143.16,81.6 143.16,73.98
N$30
  Bottom 0.305: 90.56,-10.78 98.18,-10.78
N$31
  Bottom 0.305: 105.8,-3.16 105.8,4.46
N$32
  Bottom 0.305: 113.42,-10.78 121.04,-10.78
N$33
  Top 0.406: IC3.7 93.98,148.44
  Top 0.61: 93.98,148.44 R29.2
  Top 0.813: R16.1 96.52,152.21 94.57,152.21 93.95,151.71 R29.2
N$34
  Bottom 0.305: 105.8,-18.4 105.8,-26.02
N$35
  Top 0.305: 82.94,-10.78 90.56,-10.78
N$36
  Top 0.305: 98.18,-10.78 113.42,-10.78
N$37
  Top 0.406: 95.25,149.38 R29.1
  Top 0.61: 93.94,145.1 95.25,145.77 IC3.6 95.25,149.38 | 93.94,145.1 IC3.2 | C24.+ 92.07,145.1 93.94,145.1
N$38
  Top 0.305: 121.04,-10.78 128.66,-10.78
N$39
  Top 0.305: 105.8,-3.16 105.8,-18.4
N$40
  Top 0.305: 105.8,4.46 105.8,12.08
N$41
  Top 0.305: 105.8,-26.02 105.8,-33.64
N$42
  Bottom 0.305: -38.98,73.04 -31.36,73.04
N$43
  Bottom 0.305: -23.74,80.66 -23.74,88.28
N$44
  Bottom 0.305: -16.12,73.04 -8.5,73.04
N$45
  Bottom 0.305: -23.74,65.42 -23.74,57.8
N$46
  Top 0.305: -46.6,73.04 -38.98,73.04
N$47
  Top 0.305: -31.36,73.04 -16.12,73.04
N$48
  Top 0.305: -8.5,73.04 -0.88,73.04
N$49
  Top 0.305: -23.74,80.66 -23.74,65.42
N$50
  Top 0.305: -23.74,88.28 -23.74,95.9
N$51
  Top 0.305: -23.74,57.8 -23.74,50.18
N$52
  Bottom 0.813: R26.1 25.82,58.53 24.52,59.83 20.61,59.83 JP1.1
N$53
  Top 0.813: R2.2 QP1.1 R8.2
N$54
  Bottom 0.813: R27.1 29.92,58.12 28.33,56.53 19.44,56.53 JP3.1
N$56
  Top 0.813: R35.1 R37.2 QP2.1
N$58
  Top 0.813: R38.1 R36.2 94.14,128.67 91.83,128.62 QP3.1
N$61
  Top 0.813: QP1.3 R31.2 R13.1 94.01,111.72 96.48,111.72 97.44,114.49 97.39,123.08 R38.2
N$63
  Top 0.813: R31.1 R32.1 QP4.1
N$64  (via drill 0.6 pad 1.68)
  Top 0.813: v95.51,122.44 R32.2 | QP2.3 93.86,132.7 v93.86,133.01 92.38,134.49 R17.1
  Bottom 0.813: v95.51,122.44 95.51,128.64 v93.86,133.01
N$65
  Top 0.813: QP4.3 R34.1 R33.2
N$69
  Top 0.813: R42.1 QP3.3 R43.2
PWM  (via drill 0.6 pad 1.68)
  Top 0.813: v95.16,113.32 R2.1
  Bottom 0.61: 92.41,110.53 v95.16,113.32
  Bottom 0.813: CON_POD.2 92.41,110.53
PWM_POD1_LPC  (via drill 0.6 pad 1.68)
  Top 0.813: v67.78,60.01 71.74,63.59 v78.34,63.54
  Bottom 0.305: 62.24,41.54 59.95,41.54
  Bottom 0.61: v67.78,60.01 67.7,59.93 67.7,47.64 63.89,43.83 63.89,43.2 62.24,41.54 | 59.95,41.54 EXT1.8
  Bottom 0.813: CON_POD1.2 v78.34,63.54 77.85,63.54 77.83,63.52
PWM_POD2_LPC
  Bottom 0.254: 60.1,39.03 57.67,39.03 | 37.07,33.95 32.19,33.95
  Bottom 0.61: EXT1.9 60.1,39.03 | 57.67,39.03 54.54,39.03 48.83,33.95 37.07,33.95 | 32.19,33.95 CON_POD2.2
PWM_POD3_LPC
  Bottom 0.61: 52.76,35.17 55.36,37.76 EXT1.10
  Bottom 0.813: CON_POD3.2 58.71,8.19 52.76,14.62 52.76,35.17
RX0_LPC  (via drill 0.6 pad 1.68)
  Top 0.406: 59.95,62.86 UART.4
  Top 0.813: v58.71,50.84 58.71,54.4 59.95,60.57 59.95,62.86
  Bottom 0.61: EXT1.2 v58.71,50.84
SCL0_LPC  (via drill 0.6 pad 1.68)
  Top 0.813: I2C_2.4 29.98,65.17 32.27,67.15 44.61,67.15 | v64.45,46.7 65.54,47.89 65.54,64.02 63.58,67.15 44.61,67.15 | I2C_1.4 44.61,67.15
  Bottom 0.61: EXT1.3 62.9,45.38 63.89,46.37 v64.45,46.7
  Bottom 0.813: R27.2 I2C_2.4
SDA0_LPC  (via drill 0.6 pad 1.68)
  Top 0.813: I2C_1.3 42.07,60.8 49.89,57.72 49.89,48.81 v53.32,45.38
  Bottom 0.406: I2C_1.3 42.05,64.66
  Bottom 0.813: R26.2 I2C_2.3 29.19,68.62 41,68.62 42.05,64.66 | EXT1.4 v53.32,45.38
SW1_LPC
  Bottom 0.813: EXT2.1 35.95,48.02 35.95,49.55 35.31,50.18 31.89,50.18 29.75,49.31 S2.2 26.04,49.29 24.87,47.87 R10.1
SW2_LPC
  Bottom 0.813: EXT2.2 33.28,47.89 32.39,47.89 30.13,46.77 S2.1 27.67,42.56 R11.1
SW3_LPC
  Bottom 0.813: EXT2.3 35.87,45.35 36.84,45.35 37.85,46.88 37.85,50.56 36.13,52.19 31.94,52.19 R9.1 S2.3
TX0_LPC  (via drill 0.6 pad 1.68)
  Top 0.813: v61.25,50.87 62.87,57.11 v62.87,63.13
  Bottom 0.406: 57.29,62.86 UART.3
  Bottom 0.61: v61.25,50.87 EXT1.1
  Bottom 0.813: v62.87,63.13 61.6,65.93 58.05,65.93 57.29,62.86
VS_A
  Top 0.61: IR2184SPBF2.6 C6.1 | 81.75,127.55 76.39,127.54 D3.A
  Top 0.813: D3.A 72.4,129 70.41,131.46 R40.2 69.1,136.92 71.42,140.77 C6.1 | 81.75,127.55 82.91,129.28 D1.C
VS_B
  Top 0.61: IR2184SPBF1.6 C5.1
  Top 0.813: D14.C 69.68,107.5 69.91,107.9 | 69.91,107.9 D7.A | C5.1 71.74,116.6 R41.1 69.33,116.14 68.33,113.81 68.33,109.62 69.91,107.9

## Text on the board
Top: ENAC Robotique by | YOANN S. | Carte POD rev2 | GND | 12V | PWM | GND | DIR | GND | 12V | I2C0 | I2C0 | UART | Coupe 2015 Rev3 | Carte cont. PODs | DIR | PWM | GND | POD1 | 5V | PULL | R. | ENC1 | SW3 | SW2 | SW1 | TOP | YOANN S. | POD2 | ENC2 | DIR | PWM | GND | ENC3 | GND | 5V | 3V3 | ENAC Robotique by | GND | DIR | POD3 | PWM | 5V | GND
Bottom: BOTTOM